# Altium PCB SiLabsProg2_V14C.PcbDoc
Units mm, origin at the board's own origin, x right, y up, seen from the top; angles counter-clockwise.
Board outline 40 x 76.83 mm, 2 copper layers (Top Layer, Bottom Layer); 101 components, 102 nets, 415 pads, 123 vias.
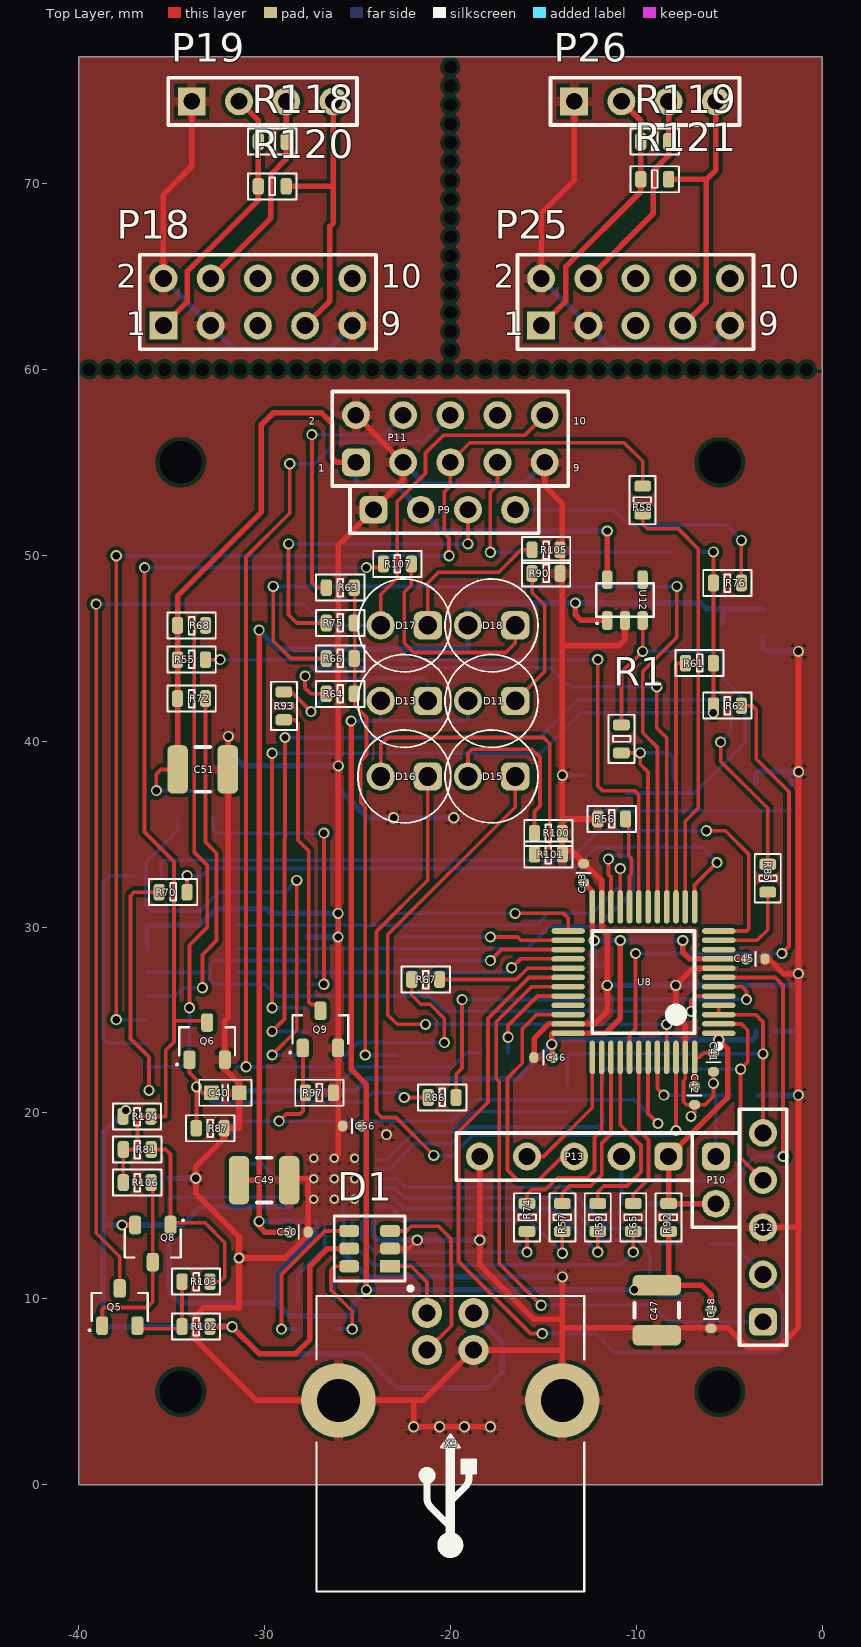
[diagram p0: Top Layer view]
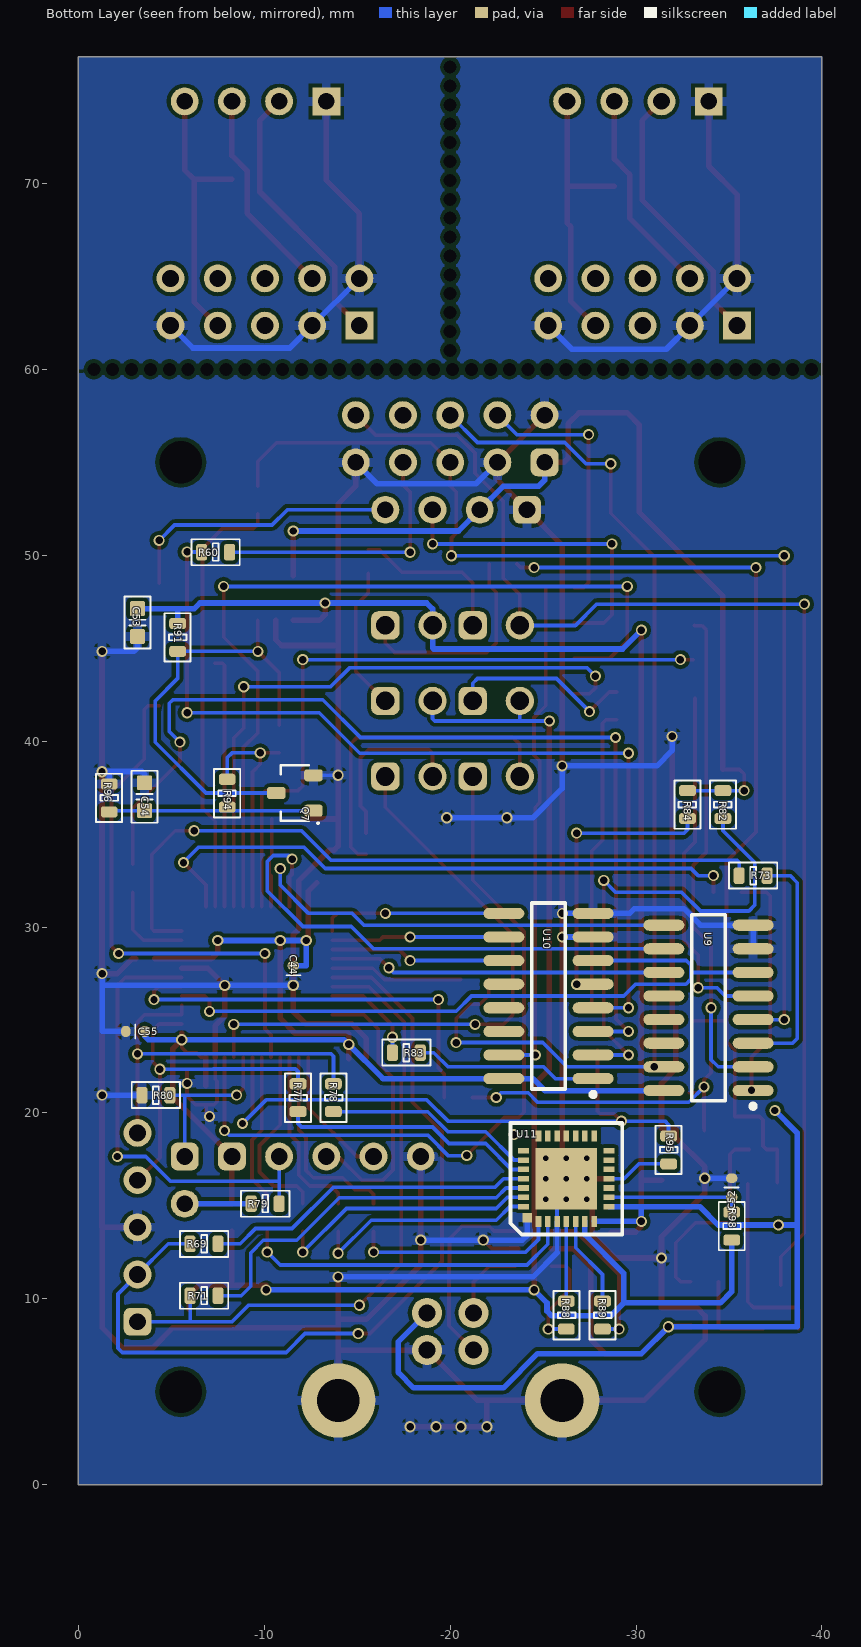
[diagram p1: Bottom Layer view, seen from below]
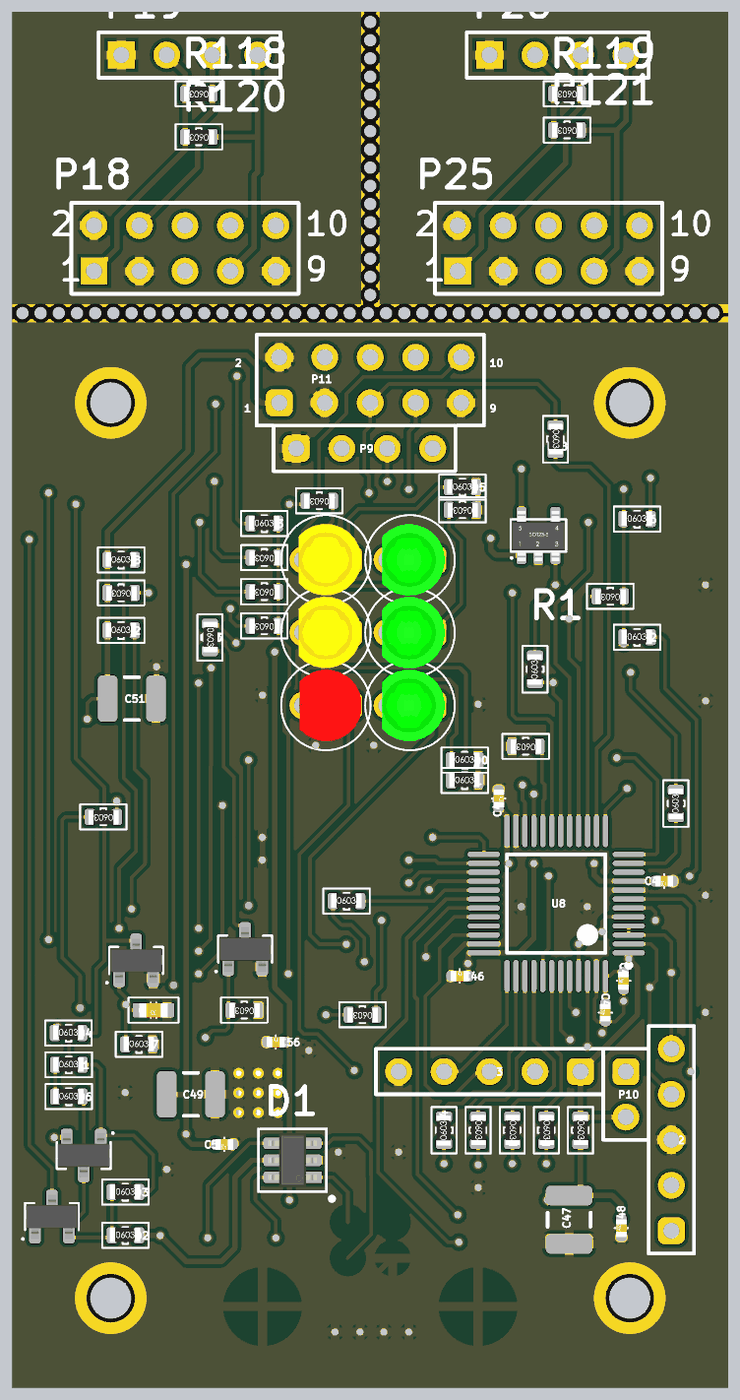
[diagram p2: 3D render of the assembled board from above, using the file's embedded part models]
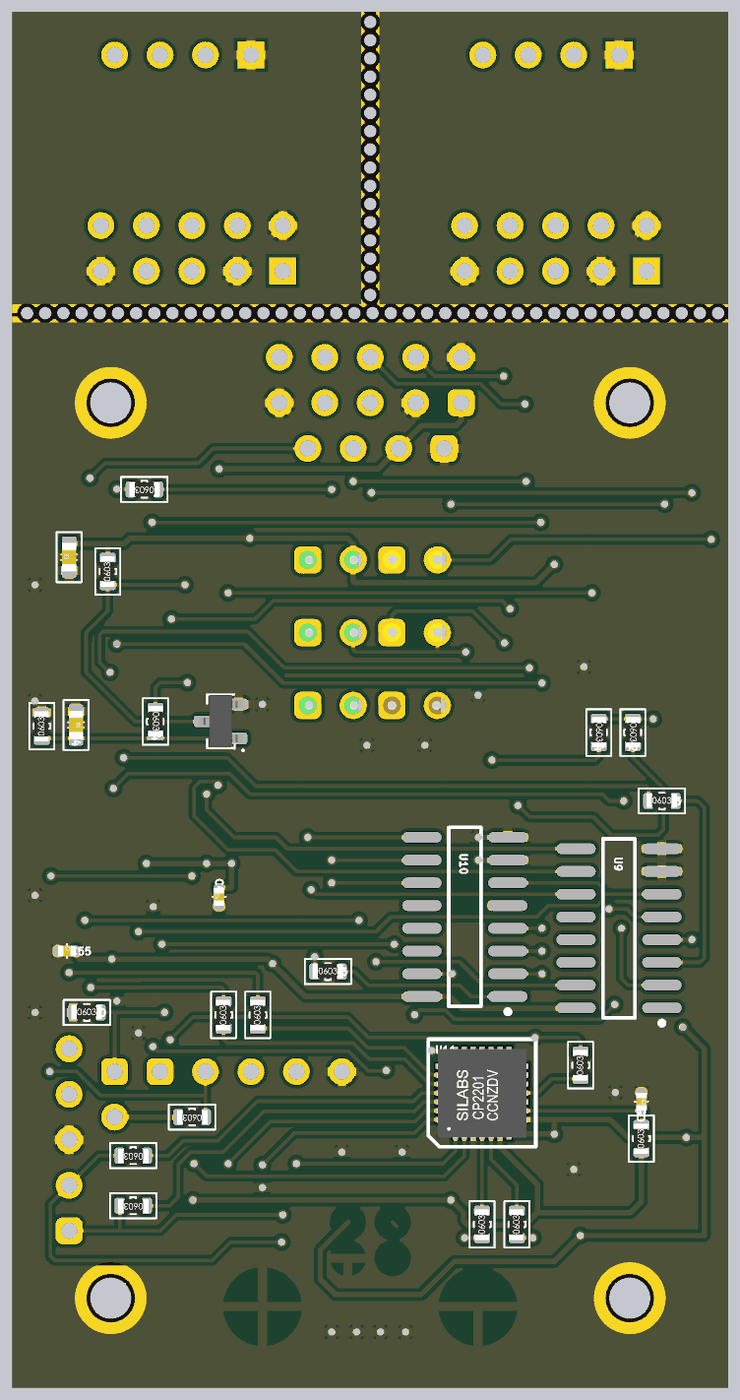
[diagram p3: 3D render of the assembled board from below, using the file's embedded part models]

## Layer stack, top to bottom
Top Layer: signal copper 0.0356
Dielectric: dielectric 0.32, FR-4, Dk 4.8
Bottom Layer: signal copper 0.0356

## Board outline
-40,76.835 0,76.835 0,0 -40,0

## Design rules (kind name [scope] priority, off if disabled: settings)
Clearance [All] p1: gap=0.2
ComponentClearance [All] p1 off: gap=0.254 collisioncheckmode=3 verticalgap=0.25 showdistances=FALSE
FabricationTestPointUsage TestPointUsage [All] p1: valid=0 allowmultiple=FALSE
FabricationTestpoint Testpoint [All] p1: side=3 testpointundercomponent=TRUE minsize=1.016 maxsize=2.54 preferedsize=1.524 minholesize=0 maxholesize=1.016 preferedholesize=0.813 testpointgrid=0.025 allowsidetop=TRUE allowsidebottom=TRUE usegrid=TRUE gridtolerance=0
Height [All] p1 off: minheight=0 maxheight=25.4 prefheight=12.7
HoleSize [All] p1: absolutevalues=TRUE maxlimit=3.5 minlimit=0.3 maxpercent=80.000 minpercent=20.000
PolygonConnect PolygonConnect_BigHole [(IsVia And (HoleDiameter >= 0.4)) or (IsPad And (HoleDiameter >= 0.4))] p1: connectstyle=Relief reliefconductorwidth=0.5 reliefentries=4 polygonreliefangle="90 Angle"
PolygonConnect PolygonConnect_SmallHole [All] p2: connectstyle=Relief reliefconductorwidth=0.5 reliefentries=4 polygonreliefangle="90 Angle"
RoutingCorners [All] p1: cornerstyle=45-Degree minsetback=1 maxsetback=1
RoutingVias [All] p1: holewidth=0.3 width=0.6 viastyle="Through Hole" minholewidth=0.2 minwidth=0.5 maxholewidth=0.4 maxwidth=0.7
SilkscreenOverComponentPads [All] p1: minsilkscreentomaskgap=0.254
SolderMaskExpansion [All] p1: expansion=0.05
Width [All] p1: maxlimit=0.4 minlimit=0.2 preferedwidth=0.3
21 further rules are at their usual default settings.

## Components (designator, comment, footprint, x,y, rotation, side; value= is the part's Value field where it differs from the comment)
C40 "1nF" R1608_CAP -31.355,21.082 r180 top
C41 "0.1uF" R1005_CAP -5.842,22.241 r90 top
C42 "0.1uF" R1005_CAP -6.858,20.463 r90 top
C43 "0.1uF" R1005_CAP -12.827,33.385 r270 top
C44 "0.1uF" R1005_CAP -11.557,26.924 r90 bottom
C45 "0.1uF" R1005_CAP -3.098,28.287 r180 top
C46 "0.1uF" R1005_CAP -15.478,22.987 r0 top
C47 "4.7uF" CAPC3225L -8.89,9.382 r270 top
C48 "0.1uF" R1005_CAP -5.969,8.431 r90 top
C49 "4.7uF" CAPC3225L -30.019,16.383 r0 top
C50 "0.1uF" R1005_CAP -27.672,13.589 r180 top
C51 "4.7uF" CAPC3225L -33.321,38.481 r0 top
C52 "0.1uF" R1005_CAP -35.145,16.461 r270 bottom
C53 "1uF" R1608_CAP -3.175,45.631 r90 bottom
C54 "1nF" R1608_CAP -3.556,37.761 r270 bottom
C55 "0.1uF" R1005_CAP -2.57,24.384 r180 bottom
C56 "0.1uF" R1005_CAP -25.765,19.304 r0 top
D1 "USBLC6-2P6" SOT23-6 -23.241,11.75 r180 top
D11 "LED_G" LED3G -16.51,42.164 r180 top locked
D13 "LED_Y" LED3Y -21.209,42.164 r180 top locked
D15 "LED_G" LED3G -16.51,38.1 r180 top locked
D16 "LED_R" LED3R -21.209,38.1 r180 top locked
D17 "LED_Y" LED3Y -21.209,46.228 r180 top locked
D18 "LED_G" LED3G -16.51,46.228 r180 top locked
P9 "SiLabs C2" HDR1X4#1 -24.13,52.451 r0 top locked
P10 "STM_PROG" HDR1X2 -5.715,17.653 r270 top locked
P11 "SiLabs JTAG" HDR2X5#1 -25.08,55 r0 top
P12 "UART" HDR1X5 -3.175,8.763 r90 top locked
P13 "STM SWD" HDR1X5 -8.255,17.653 r180 top locked
P18 "SiLabs JTAG" HDR2X5#2 -35.433,62.357 r0 top locked
P19 "SiLabs C2" HDR1X4#2 -33.909,74.422 r0 top locked
P25 "SiLabs JTAG" HDR2X5#2 -15.113,62.357 r0 top locked
P26 "SiLabs C2" HDR1X4#2 -13.335,74.422 r0 top locked
Q5 "IRLML6402" SOT23-1 -37.785,9.557 r0 top
Q6 "BC847" SOT23-1 -33.081,23.86 r0 top
Q7 "BC847" SOT23-1 -11.641,37.211 r90 bottom
Q8 "BC807-25" SOT23-1 -36.007,12.97 r180 top
Q9 "BC847" SOT23-1 -26.99,24.495 r0 top
R1 "100*" R1608_RES -10.795,39.37 r90 top
R55 "100" R1608_RES -33.171,44.386 r180 top
R56 "5.1k" R1608_RES -10.565,35.814 r180 top
R57 "100" R1608_RES -13.97,15.127 r270 top
R58 "100" R1608_RES -9.652,53.721 r270 top
R59 "100" R1608_RES -12.065,15.127 r270 top
R60 "100" R1608_RES -8.128,50.165 r0 bottom
R61 "100" R1608_RES -5.842,44.196 r180 top
R62 "0" R1608_RES -5.842,41.91 r0 top
R63 "100" R1608_RES -26.67,48.26 r0 top
R64 "100" R1608_RES -25.17,42.545 r180 top
R65 "100" R1608_RES -10.16,15.127 r270 top
R66 "100" R1608_RES -25.17,44.45 r180 top
R67 "100" R1608_RES -22.074,27.178 r0 top
R68 "5.1k" R1608_RES -34.671,46.228 r0 top
R69 "100" R1608_RES -7.507,12.954 r0 bottom
R70 "5.1k" R1608_RES -34.163,31.877 r180 top
R71 "100" R1608_RES -7.507,10.16 r0 bottom
R72 "5.1k" R1608_RES -34.671,42.291 r0 top
R73 "5.1k" R1608_RES -35.546,32.766 r180 bottom
R74 "100" R1608_RES -15.875,13.627 r90 top
R75 "100" R1608_RES -25.17,46.355 r180 top
R76 "100" R1608_RES -5.842,48.514 r0 top
R77 "100" R1608_RES -11.811,20.066 r90 bottom
R78 "100" R1608_RES -13.716,20.066 r90 bottom
R79 "47k" R1608_RES -10.795,15.113 r0 bottom
R80 "47k" R1608_RES -3.415,20.955 r180 bottom
R81 "18k" R1608_RES -37.592,18.034 r0 top
R82 "5.1k" R1608_RES -34.671,37.338 r270 bottom
R83 "5.1k" R1608_RES -16.891,23.241 r180 bottom
R84 "5.1k" R1608_RES -32.766,37.338 r270 bottom
R85 "5.1k" R1608_RES -2.921,31.877 r90 top
R86 "5.1k" R1608_RES -19.685,20.828 r180 top
R87 "47k" R1608_RES -33.669,19.177 r0 top
R88 "27" R1608_RES -26.25,8.368 r90 bottom
R89 "27" R1608_RES -28.194,8.368 r90 bottom
R90 "330" R1608_RES -14.097,49.022 r180 top
R91 "47k" R1608_RES -5.334,44.831 r90 bottom
R92 "0" R1608_RES -8.255,15.127 r270 top
R93 "330" R1608_RES -28.956,42.648 r270 top
R94 "5.1k" R1608_RES -8.001,37.949 r270 bottom
R95 "5.1k" R1608_RES -31.75,17.258 r90 bottom
R96 "47k" R1608_RES -1.651,36.195 r90 bottom
R97 "47k" R1608_RES -26.289,21.082 r180 top
R98 "4.7k" R1608_RES -35.145,13.16 r90 bottom
R100 "330" R1608_RES -15.47,35.052 r0 top
R101 "330" R1608_RES -15.47,33.909 r0 top
R102 "3.0" R1608_RES -34.431,8.509 r0 top
R103 "150" R1608_RES -34.431,10.922 r0 top
R104 "2.2k" R1608_RES -37.606,19.812 r0 top
R105 "330" R1608_RES -15.597,50.292 r0 top
R106 "2.2k" R1608_RES -37.592,16.256 r0 top
R107 "330" R1608_RES -22.098,49.53 r180 top
R118 "R" R1608_RES -28.829,72.263 r180 top
R119 "R" R1608_RES -8.255,72.263 r180 top
R120 "R" R1608_RES -28.829,69.85 r180 top
R121 "R" R1608_RES -8.255,70.231 r180 top
U8 "STM32F100C8T6B" LQFP48_N -9.608,27.037 r180 top locked
U9 "M74HC4053M1R" SO16_N -33.896,25.654 r0 bottom locked
U10 "M74HC4053M1R" SO16_N -25.286,26.289 r0 bottom locked
U11 "CP2102-GM" QFN28 -26.25,16.461 r90 bottom locked
U12 "TPS76333 / NCP551" SOT23-5D -10.602,47.59 r0 top
X3 "USB-B" USB_TypeB_Tyco -20,-5.751 r90 top locked

## Footprints (in the part's own frame and the unit in brackets; to place one, negate y for a bottom-side part, rotate by r counter-clockwise, add the part's x,y. Pads: shape width x height; smd on the part's side, far side on the other; paste and mask are expansions set on the pad)
CAPC3225L [mm] "Chip Capacitor, Body 3.2x2.5mm, IPC High Density"
  rrect50% 1.1x2.6 smd: 1(-1.35,0) 2(1.35,0)
  silkscreen extent -0.4,-1.2 0.4,1.2, body extent -1.7,-1.35 1.7,1.35, height 1.5
HDR1X2 [mm] "Connector; Header; 2 Position"
  rrect50% 1.5x1.5 hole 0.9: 1(0,0)
  round 1.5 hole 0.9: 2(2.54,0)
  silkscreen extent -1.27,-1.27 3.81,1.27
HDR1X4#1 [mm] "Connector; Header; 4 Position"
  rrect50% 1.5x1.5 hole 0.9: 1(0,0)
  round 1.5 hole 0.9: 2(2.54,0) 3(5.08,0) 4(7.62,0)
  silkscreen extent -1.27,-1.27 8.89,1.27
HDR1X4#2 [mm] "Connector; Header; 4 Position"
  rect 1.5x1.5 hole 0.9: 1(0,0)
  round 1.5 hole 0.9: 2(2.54,0) 3(5.08,0) 4(7.62,0)
  silkscreen extent -1.27,-1.27 8.89,1.27
HDR1X5 [mm] "Connector; Header; 5 Position"
  rrect50% 1.5x1.5 hole 0.9: 1(0,0)
  round 1.5 hole 0.9: 2(2.54,0) 3(5.08,0) 4(7.62,0) 5(10.16,0)
  silkscreen extent -1.27,-1.27 11.43,1.27
HDR2X5#1 [mm] "Connector; Header; 5x2 Position"
  rrect50% 1.5x1.5 hole 0.9: 1(0,0)
  round 1.5 hole 0.9: 2(0,2.54) 3(2.54,0) 4(2.54,2.54) 5(5.08,0) 6(5.08,2.54) 7(7.62,0) 8(7.62,2.54) 9(10.16,0) 10(10.16,2.54)
  silkscreen extent -1.27,-1.27 11.43,3.81
HDR2X5#2 [mm] "Connector; Header; 5x2 Position"
  rect 1.5x1.5 hole 0.9: 1(0,0)
  round 1.5 hole 0.9: 2(0,2.54) 3(2.54,0) 4(2.54,2.54) 5(5.08,0) 6(5.08,2.54) 7(7.62,0) 8(7.62,2.54) 9(10.16,0) 10(10.16,2.54)
  silkscreen extent -1.27,-1.27 11.43,3.81
LED3G [mil]
  rrect50% 60x60 hole 39.37: 1(0,0)
  round 60 hole 39.37: 2(100,0)
  silkscreen extent -48,-98 148,98, body extent -26,-78 111,78, height 244
LED3R [mil]
  rrect50% 60x60 hole 39.37: 1(0,0)
  round 60 hole 39.37: 2(100,0)
  silkscreen extent -48,-98 148,98, body extent -29,-78 108,78, height 244
LED3Y [mil]
  rrect50% 60x60 hole 39.37: 1(0,0)
  round 60 hole 39.37: 2(100,0)
  silkscreen extent -48,-98 148,98, body extent -28,-79 110,78, height 244
LQFP48_N [mm] "Thin QFP, 48-Leads, Body 7x7mm, Pitch 0.5mm, IPC Medium Density"
  oval 1.8x0.3 smd: 1(-4.05,2.75) 2(-4.05,2.25) 3(-4.05,1.75) 4(-4.05,1.25) 5(-4.05,0.75) 6(-4.05,0.25) 7(-4.05,-0.25) 8(-4.05,-0.75) 9(-4.05,-1.25) 10(-4.05,-1.75) 11(-4.05,-2.25) 12(-4.05,-2.75) 25(4.05,-2.75) 26(4.05,-2.25) 27(4.05,-1.75) 28(4.05,-1.25) 29(4.05,-0.75) 30(4.05,-0.25) 31(4.05,0.25) 32(4.05,0.75) 33(4.05,1.25) 34(4.05,1.75) 35(4.05,2.25) 36(4.05,2.75)
  oval 0.3x1.8 smd: 13(-2.75,-4.05) 14(-2.25,-4.05) 15(-1.75,-4.05) 16(-1.25,-4.05) 17(-0.75,-4.05) 18(-0.25,-4.05) 19(0.25,-4.05) 20(0.75,-4.05) 21(1.25,-4.05) 22(1.75,-4.05) 23(2.25,-4.05) 24(2.75,-4.05) 37(2.75,4.05) 38(2.25,4.05) 39(1.75,4.05) 40(1.25,4.05) 41(0.75,4.05) 42(0.25,4.05) 43(-0.25,4.05) 44(-0.75,4.05) 45(-1.25,4.05) 46(-1.75,4.05) 47(-2.25,4.05) 48(-2.75,4.05)
  silkscreen extent -4.18,-2.75 2.75,3.57, body extent -3.5,-3.5 3.5,3.5, height 1.6
QFN28 [mm] "QFN, 28-Leads, Body 5x5mm, Pitch 0.5mm, Thermal Pad 3.13x3.13mm, IPC Medium Density"
  rrect10% 0.6x0.3 smd mask+0.1: 1(-2.3,1.5) 2(-2.3,1) 3(-2.3,0.5) 4(-2.3,0) 5(-2.3,-0.5) 6(-2.3,-1) 7(-2.3,-1.5) 15(2.3,-1.5) 16(2.3,-1) 17(2.3,-0.5) 18(2.3,0) 19(2.3,0.5) 20(2.3,1) 21(2.3,1.5)
  rrect10% 0.3x0.6 smd mask+0.1: 8(-1.5,-2.3) 9(-1,-2.3) 10(-0.5,-2.3) 11(0,-2.3) 12(0.5,-2.3) 13(1,-2.3) 14(1.5,-2.3) 22(1.5,2.3) 23(1,2.3) 24(0.5,2.3) 25(0,2.3) 26(-0.5,2.3) 27(-1,2.3) 28(-1.5,2.3)
  rect 0.5x0.5 smd mask+0.1: 29(-2.1,2.1)
  rect 3.3x3.3 smd paste-1.65 mask+0: 29(0,0)
  silkscreen extent -3,-3 3,3, body extent -2.51,-2.5 2.49,2.5, height 1.07
R1005_CAP [mm] "SMD CAP-0402"
  rrect90% 0.5x0.6 smd: 1(-0.025,0) 2(1,0)
  silkscreen extent 0.48,-0.38 0.48,0.38, body extent -0.02,-0.3 0.98,0.3, height 0.2
R1608_CAP [mm] "SMD CAP-0603"
  rrect20% 0.8x0.8 smd: 1(0,0) 2(1.5,0)
  silkscreen extent -0.65,-0.7 2.15,0.7, body extent -0.05,-0.4 1.55,0.4, height 0.3
R1608_RES [mm] "SMD RES-0603"
  rrect50% 0.6x0.9 smd: 1(0,0) 2(1.5,0)
  silkscreen extent -0.55,-0.7 2.05,0.7, body extent -0.11,-0.38 1.59,0.42, height 0.56
SO16_N [mm] "SOIC, 16-Leads, Body 9.9x3.9mm, Pitch 1.27mm, IPC Medium Density"
  oval 2.2x0.6 smd: 1(-2.4,4.445) 2(-2.4,3.175) 3(-2.4,1.905) 4(-2.4,0.635) 5(-2.4,-0.635) 6(-2.4,-1.905) 7(-2.4,-3.175) 8(-2.4,-4.445) 9(2.4,-4.445) 10(2.4,-3.175) 11(2.4,-1.905) 12(2.4,-0.635) 13(2.4,0.635) 14(2.4,1.905) 15(2.4,3.175) 16(2.4,4.445)
  silkscreen extent -2.52,-5 0.9,5.42, body extent -1.95,-4.95 1.95,4.95, height 1.75
SOT23-1 [mm] "SOT23, 3-Leads, Body 2.9x1.3mm, Pitch 0.95mm, Lead Span 2.5mm"
  rrect50% 0.65x1 smd: 1(-0.95,-1) 2(0.95,-1) 3(0,1)
  silkscreen extent -1.68,-1.3 1.5,0.75, body extent -1.46,-1.25 1.46,1.22, height 1
SOT23-5D [mm] "SOT23, 5-Leads, Body 2.9x1.3mm, Pitch 0.95mm, Lead Span 2.5mm"
  rrect50% 0.55x1 smd: 1(-0.95,-1.1) 2(0,-1.1) 3(0.95,-1.1) 4(0.95,1.1) 5(-0.95,1.1)
  silkscreen extent -1.55,-1.3 1.55,0.9, body extent -1.45,-1.42 1.45,1.38, height 1.09
SOT23-6 [mm]
  rect 1.06x0.65 smd: 1(0,0)
  rrect50% 1.06x0.65 smd: 2(0,-0.95) 3(0,-1.9) 4(2.2,-1.9) 5(2.2,-0.95) 6(2.2,0)
  silkscreen extent -1.2,-2.7 3,1.3, body extent -0.25,-2.45 2.45,0.55, height 1
USB_TypeB_Tyco [mm]
  round 1.626 hole 0.914: 1(14.99,-1.25) 2(14.99,1.25) 3(12.99,1.25) 4(12.99,-1.25)
  round 4 hole 2.3: MH(10.28,-6.02) MH(10.28,6.02)
  silkscreen extent 0,-7.2 15.9,7.2, body extent 0,-7.19 15.7,7.19, height 11.5

## Part data
C40 C41 C42 C43 C44 C45 C46 C48 C50 C52 C53 C54 C55 C56: library part C, "Capacitor"
C47 C49 C51: library part "Cap Pol1", "Polarized Capacitor (Radial)"
P9 P19 P26: library part "Header 4", "Header, 4-Pin"
P10: library part "Header 2", "Header, 2-Pin"
P11 P18 P25: library part "Header 5X2", "Header, 5-Pin, Dual row"
P12 P13: library part "Header 5", "Header, 5-Pin"
Q5: library part IRLML6401, "HEXFET Power MOSFET"
Q6 Q7 Q9: "NPN General-purpose Transistor"
Q8: "PNP General-purpose Transistor"
R1 R55 R56 R57 R58 R59 R60 R61 R62 R63 R64 R65 R66 R67 R68 R69 R70 R71 R72 R73 R74 R75 R76 R77 R78 R79 R80 R81 R82 R83 R84 R85 R86 R87 R88 R89 R90 R91 R92 R93 R94 R95 R96 R97 R98 R100 R101 R102 R103 R104 R105 R106 R107: library part R, "Resistor"
R118 R119 R120 R121: "Resistor"
U8: "STM32 ARM-based 32-bit MCU Value Line with 64 kB Flash, 8 kB Internal RAM, Internal Code B, -40 to +85°C Temperature, 48-Pin LQFP, Tray"
U9 U10: "Analog Multiplexer/Demultiplexer Triple 2-Channel"
U11: "Single Chip USB to UART Bridge, USB 2.0, 1024Bytes EEPROM."
U12: library part TPS76333, "300 mA, Low Voltage, Low Quiescent Current LDO Regulator, 5-Pin SOT-23, Extended Temperature, Tape and Reel"
X3: library part USB_TypeB, "Connector THT Type B USB connector"

## Free pads (board coordinates)
  round 0 hole 0.7 unplated mask+0.4: HOLE(-39.433,60.008) HOLE(-38.417,60.008) HOLE(-37.401,60.008) HOLE(-36.385,60.008) HOLE(-35.369,60.008) HOLE(-34.353,60.008) HOLE(-33.337,60.008) HOLE(-32.321,60.008) HOLE(-31.305,60.008) HOLE(-30.289,60.008) HOLE(-29.273,60.008) HOLE(-28.257,60.008) HOLE(-27.241,60.008) HOLE(-26.225,60.008) HOLE(-25.209,60.008) HOLE(-24.193,60.008) HOLE(-23.177,60.008) HOLE(-22.161,60.008) HOLE(-21.145,60.008) HOLE(-20.129,60.008) HOLE(-20,61.023) HOLE(-20,62.04) HOLE(-20,63.056) HOLE(-20,64.072) HOLE(-20,65.088) HOLE(-20,66.104) HOLE(-20,67.12) HOLE(-20,68.136) HOLE(-20,69.152) HOLE(-20,70.168) HOLE(-20,71.184) HOLE(-20,72.2) HOLE(-20,73.216) HOLE(-20,74.232) HOLE(-20,75.248) HOLE(-20,76.264) HOLE(-19.113,60.008) HOLE(-18.097,60.008) HOLE(-17.081,60.008) HOLE(-16.065,60.008) HOLE(-15.049,60.008) HOLE(-14.033,60.008) HOLE(-13.017,60.008) HOLE(-12.001,60.008) HOLE(-10.985,60.008) HOLE(-9.969,60.008) HOLE(-8.953,60.008) HOLE(-7.937,60.008) HOLE(-6.921,60.008) HOLE(-5.905,60.008) HOLE(-4.889,60.008) HOLE(-3.873,60.008) HOLE(-2.857,60.008) HOLE(-1.841,60.008) HOLE(-0.825,60.008)
  round 0 hole 2.3 unplated mask+2: HOLE(-34.5,5) HOLE(-34.5,55) HOLE(-5.5,5) HOLE(-5.5,55)

## Via types
v1: diameter 0.6, hole 0.4, Top Layer to Bottom Layer, tented both sides, 114 vias
v2: diameter 0.5, hole 0.3, Top Layer to Bottom Layer, 9 vias

## Nets (pads, with @x,y where several pads share a name; then routed paths per layer and width w, separated by ;. In a path a pad name is that pad's centre, name@x,y a point inside that pad or via, vN(x,y) a via of type N, cw(c..) or ccw(c..) an arc to the next point about the centre after c; other vN are vias at no path point)
BOOT0: P10.1 R80.2 U8.44 | length 9.1
  Top Layer w0.2: U8.44 -8.858,21.304 v1(-8.509,20.955)
  Bottom Layer w0.2: v1(-8.509,20.955) -5.715,20.955 ; P10.1 -5.715,20.955 ; R80.2 -5.715,20.955
BOOT1: R56.1 U8.20 | length 4.8
  Top Layer w0.2: R56.1@-10.4,35.814 -10.4,33.831 -10.258,33.69 -10.258,32.858 -10.358,32.758 U8.20
DBL_CLK: R62.2 U8.41 | length 28.4
  Top Layer w0.2: U8.41 -10.358,24.186 -10.033,24.511 v1@-10.033,28.511 ; R62.2 -3.746,41.91 -3.542,41.705 -3.542,39.038 -1.778,37.274 -1.778,28.956 v1(-2.159,28.575)
  Bottom Layer w0.2: v1(-10.033,28.575) v1(-2.159,28.575)
GNN: C40.1 C41.1 C42.1 C43.1 C44.1 C45.1 C46.1 C47.2 C48.1 C49.2 C50.1 C51.2 C52.1 C53.1 C54.1 C55.1 C56.1 D1.2 P9.1 P11.2 P11.3 P11.9 P12.3 P13.5 Q6.2 Q7.2 Q9.2 R56.2 R80.1 R87.2 R90.1 R96.2 R97.1 R100.2 R101.2 R105.2 U8.8 U8.23 U8.35 U8.47 U9.7 U9.8 U10.7 U10.8 U11.3 U11.29 U12.2 X3.4 X3.MH | length 331
  Top Layer w0.2: D1.2 -22.234,12.7 v1(-21.78,13.154) ; U8.47 -7.358,21.805 -7.458,21.705 -7.458,20.602 -7.294,20.438 C42.1 ; v1(-7.048,19.812) -6.858,20.002 C42.1 ; C41.1 v1(-5.842,21.59) -5.842,20.891 -6.295,20.438 C42.1
  Top Layer w0.3: C51.2@-31.94,38.45 -31.94,25.146 -32.131,24.955 Q6.2 -32.131,22.352 -31.369,21.59 -31.369,19.177 R87.2 -32.169,18.631 -33.694,17.106 v1(-33.694,16.485) -33.694,15.66 -31.369,13.335 v1(-31.369,12.192) ; C51.2@-31.94,38.511 v1(-31.94,40.259) ; C49.2@-28.591,16.461 -27.647,16.461 ; C50.1@-27.647,13.525 -27.672,13.525 -27.672,13.413 -28.892,12.192 v1(-31.369,12.192) ; C50.1 -27.647,16.461 ; v2(-27.35,16.461) -27.647,16.461 ; v2(-26.25,17.561) -26.02,17.79 v1(-26.02,38.671) -26.02,50.561 P9.1 -22.54,54.041 P11.3 P11.2 ; D1.2@-23.63,12.7 D1.2 ; -21.971,4.466 v1(-21.971,3.111) v1(-20.574,3.111) v1(-19.241,3.111) v1(-17.843,3.111) ; P13.5 v1(-18.415,13.154) -18.415,11.811 -15.494,8.89 -13.98,8.89 ; C46.1@-15.494,22.987 -15.494,24.003 -14.71,24.787 U8.35 -12.234,24.787 -11.557,25.463 v1(-11.557,26.86) -11.557,29.591 -11.858,29.892 U8.23 -11.858,32.496 -13.494,34.131 -13.748,34.131 -13.97,34.353 R100.2 -13.97,35.814 ; P11.9 -14.92,53.719 -13.97,52.768 -13.97,45.148 ; X3.MH@-13.98,4.529 -13.98,7.239 ; v1(-13.97,11.176) -13.98,11.166 -13.98,8.89 ; R56.2 -13.97,35.814 ; U12.2@-10.607,46.495 -10.607,45.464 -10.922,45.148 -13.97,45.148 ; U8.47 -7.358,24.693 -7.874,25.209 v1(-7.874,26.86) -6.947,27.787 U8.8 ; P12.3 -1.27,13.843 ; C45.1 -2.886,28.287 -2.094,27.495 v1(-1.27,27.495) v1@-1.265,27.495 ; v1@-1.265,44.831 v1(-1.265,38.354) v1@-1.265,27.495 ; v1(-31.369,12.192) -31.369,9.525 -33.274,9.525 -33.718,9.08 -33.718,7.81 -30.437,4.529 -26.02,4.529 -21.46,4.529 X3.4 -13.98,7.239 ; -13.98,7.239 -13.98,8.445 ; -13.98,8.445 -13.98,8.89 ; -13.98,8.445 -5.08,8.445 -4,7.366 -2.349,7.366 -1.27,8.445 -1.27,13.843 ; -13.97,35.814 v1(-13.97,38.163) -13.97,45.148 ; -1.27,13.843 -1.265,13.848 v1@-1.265,27.495
  Bottom Layer w0.2: -25.75,12.478 U11.29@-25.75,14.986 ; v1@-13.967,38.161 Q7.2
  Bottom Layer w0.3: U9.7 U9.8 -33.464,30.099 -32.575,30.988 -29.908,30.988 -29.654,30.734 U10.8 v1(-26.035,30.734) ; C52.1 v1(-33.694,16.485) ; v1(-31.94,40.259) -31.94,39.497 -31.115,38.671 v1(-26.02,38.671) -26.02,37.45 -24.447,35.877 v1(-23.05,35.877) v1(-19.812,35.877) ; U10.7 v1(-26.035,29.464) ; -25.75,12.478 -24.447,11.176 v1(-13.97,11.176) ; U11.29@-24.15,14.36 -24.15,13.418 -23.885,13.154 v1(-21.78,13.154) v1(-18.415,13.154) ; P11.3 -21.388,53.848 -16.072,53.848 P11.9 ; v1(-11.557,26.86) v1(-7.874,26.86) -1.27,26.86 ; C54.1 -3.556,38.227 -3.415,38.368 v1@-1.27,38.368 ; R80.1 v1(-1.27,20.955) ; C53.1 -3.175,45.021 -2.984,44.831 v1(-1.27,44.831) ; C55.1 -1.27,24.384 -1.27,26.86 ; R96.2 -1.651,38.368 ; v1(-1.27,27.495) -1.27,26.86
  other v1: -23.431,18.83
  other v2: -27.35,15.361 -26.25,15.361 -25.15,15.361 -26.25,16.461 -25.15,16.461 -27.35,17.561 -25.15,17.561
MCTS: P12.4 R77.2 U8.2 | length 18.6
  Top Layer w0.2: U8.2 -4.34,24.787 -4,24.447 -4,22.733 v1(-4.381,22.352) -4.381,17.589 P12.4
  Bottom Layer w0.2: R77.2 -11.811,22.225 -11.67,22.366 -7.253,22.366 -7.239,22.352 v1(-4.381,22.352)
MDCD: R74.2 U8.38 | length 10.9
  Top Layer w0.2: R74.2 -15.875,15.621 -15.621,15.875 -14.859,15.875 -14.224,16.51 -12.636,16.51 -12.245,16.902 -12.245,18.68 -11.858,19.066 U8.38
MDSR: R59.1 U8.40 | length 10
  Top Layer w0.2: R59.1 -12.065,15.748 -11.747,16.065 -10.496,16.065 -9.734,16.827 -9.734,18.243 -10.858,19.367 U8.40
MDTR: R57.1 U8.39 | length 9.6
  Top Layer w0.2: R57.1 -13.97,15.684 -13.589,16.065 -12.446,16.065 -11.845,16.666 -11.845,18.381 -11.358,18.868 U8.39
MRI: R65.1 U8.42 | length 8.4
  Top Layer w0.2: R65.1 -10.16,15.621 -9.335,16.446 -9.335,18.542 -9.858,19.065 U8.42
MRTS: P12.5 R78.2 U8.3 U8.4 | length 21.1
  Top Layer w0.2: U8.4 U8.3 -3.57,25.287 -3.175,24.892 v1(-3.175,23.177) P12.5
  Bottom Layer w0.2: R78.2 -13.716,23.05 -13.589,23.177 v1(-3.175,23.177)
MRX: P12.1 R71.2 U8.31 | length 35.2
  Top Layer w0.2: v1(-15.113,9.652) -17.365,11.904 -17.365,21.683 -17.526,21.844 -17.526,24.892 -15.631,26.787 U8.31 ; P12.1@-3.644,9.232 P12.1
  Bottom Layer w0.2: v1(-15.113,9.652) -9.144,9.652 -8.255,8.763 P12.1 ; -6.007,8.789 R71.2
MTX: P12.2 R69.2 U8.30 | length 46.4
  Top Layer w0.2: v1(-15.05,8.128) -15.684,8.128 -19.558,12.001 -19.558,18.986 -17.97,20.574 -17.97,25.082 -15.766,27.287 U8.30
  Bottom Layer w0.2: v1(-15.05,8.128) -12.192,8.128 -11.176,7.112 -2.349,7.112 -2.125,7.337 -2.125,10.253 P12.2 -4.826,12.954 R69.2
NetC40_2: C40.2 Q6.1 R86.2 R87.1 | length 18
  Top Layer w0.2: Q6.1 -34.031,22.156 -33.655,21.78 v1(-33.655,21.399) ; R87.1@-33.669,19.05 R87.1 ; R87.1@-33.655,19.191 v1(-33.655,21.399) ; C40.2 -33.337,21.082 v1(-33.655,21.399) ; v1(-22.479,20.828) R86.2
  Bottom Layer w0.2: v1(-33.655,21.399) -32.829,20.574 -24.701,20.574 -24.194,21.082 -22.733,21.082 v1(-22.479,20.828)
NetC54_2: C54.2 Q7.1 R94.2 R96.1 | length 11
  Bottom Layer w0.2: Q7.1 C54.2 R96.1@-1.651,36.261
NetD1_4: D1.4 R89.1 | length 8.4
  Top Layer w0.2: v1(-29.083,8.368) -29.083,11.311 -26.744,13.65 D1.4
  Bottom Layer w0.2: v1(-29.083,8.368) R89.1
NetD1_6: D1.6 R88.1 | length 5.7
  Top Layer w0.2: D1.6 -26.223,11.75 -26.416,11.557 -26.416,10.477 -25.273,9.334 v1(-25.273,8.368)
  Bottom Layer w0.2: R88.1 v1(-25.273,8.368)
NetD11_1: D11.1 R90.2 | length 7.8
  Top Layer w0.2: D11.1 -14.922,43.751 -14.922,47.307 -15.597,47.982 R90.2
NetD13_1: D13.1 R93.1 | length 10
  Top Layer w0.2: R93.1 -28.551,42.648 v1(-27.495,41.592)
  Bottom Layer w0.2: v1(-27.495,41.592) -25.717,43.37 -21.463,43.37 -21.209,43.116 D13.1
NetD15_2: D15.2 R100.1 | length 9.6
  Top Layer w0.2: D15.2 -19.05,39.351 -18.841,39.56 -15.621,39.56 -15.176,39.116 -15.176,36.512 -15.47,36.219 R100.1
NetD16_2: D16.2 R101.1 | length 17.6
  Top Layer w0.2: D16.2 -23.749,39.814 -23.368,40.195 -14.986,40.195 -14.65,39.859 -14.65,34.309 -15.05,33.909 R101.1
NetD17_1: D17.1 R105.1 | length 8.6
  Top Layer w0.2: D17.1 -21.209,48.514 -20.637,49.085 -17.399,49.085 -16.192,50.292 R105.1
NetD18_1: D18.1 R107.1 | length 11.8
  Top Layer w0.2: R107.1 -22.098,48.387 -22.479,48.006 -22.479,45.275 -21.971,44.767 -17.018,44.767 -16.51,45.275 D18.1
NetP9_3: P9.3 R75.2 | length 17.5
  Top Layer w0.2: v1(-28.702,50.609) -28.702,46.799 -28.257,46.355 R75.2 ; v1(-19.05,50.609) P9.3
  Bottom Layer w0.2: v1(-28.702,50.609) v1(-19.05,50.609)
NetP9_4: P9.4 R76.2 | length 15.1
  Top Layer w0.2: R76.2 v1(-4.342,50.8)
  Bottom Layer w0.2: P9.4 -11.239,52.451 -10.414,51.625 -5.167,51.625 v1(-4.342,50.8)
NetQ5_1: Q5.1 Q8.3 R106.2 | length 10.3
  Top Layer w0.2: Q5.1@-38.735,8.382 -38.735,9.398 -38.608,9.525 -36.322,9.525 -36.007,9.84 Q8.3 R106.2@-36.007,16.171
NetQ5_2: Q5.2 R102.1 R103.1 | length 4.9
  Top Layer w0.2: Q5.2@-36.835,8.382 -34.558,8.382 R102.1 R103.1
NetQ7_3: Q7.3 R1.2 R91.1 U12.3 | length 23.4
  Top Layer w0.2: R1.2 -10.795,43.688 v1(-9.652,44.831) U12.3
  Bottom Layer w0.2: Q7.3@-10.541,37.211 -6.858,37.211 -4.127,39.941 -4.127,42.168 -5.334,43.374 R91.1 -5.334,44.836 -9.583,44.836 -9.588,44.831 v1(-9.652,44.831)
NetQ8_1: Q8.1 R81.2 R103.2 | length 10.9
  Top Layer w0.2: R81.2 -35.306,18.034 -35.052,17.78 -35.052,14.097 -33.211,14.097 -32.131,13.017 -32.131,11.176 -32.385,10.922 R103.2
NetQ9_3: Q9.3 R93.2 | length 16.8
  Top Layer w0.2: R93.2 -28.384,41.148 -28.194,40.957 -28.194,34.671 -27.622,34.099 -27.622,25.971 -27.478,25.827 Q9.3@-26.97,25.827
NetR68_2: R68.2 U9.2 | length 27
  Top Layer w0.2: v1(-34.036,25.654) -34.036,29.019 -33.083,29.972 -33.083,33.337 -33.782,34.036 -33.782,45.974 -33.54,46.216 -33.159,46.216 R68.2@-33.147,46.228
  Bottom Layer w0.2: U9.2 -34.417,22.479 -34.036,22.86 v1(-34.036,25.654)
NetR70_2: R70.2 U9.1 | length 12.5
  Top Layer w0.2: v1(-36.209,21.209) -36.209,23.001 -37.211,24.003 -37.211,31.686 -37.02,31.877 R70.2
NetR72_2: R72.2 U9.5 | length 19.3
  Top Layer w0.2: v1(-33.337,26.733) -33.337,28.511 -32.575,29.273 -32.575,33.972 -33.171,34.568 R72.2
  Bottom Layer w0.2: U9.5 -34.798,26.289 -34.353,26.733 v1(-33.337,26.733)
NetR73_2: R73.2 U9.3 | length 12.6
  Bottom Layer w0.2: R73.2 -38.29,32.766 -38.671,32.385 -38.671,24.003 -38.418,23.749 U9.3
NetR82_2: R82.2 U10.2 | length 26.2
  Top Layer w0.2: v1(-29.591,23.114) -28.257,24.447 v1(-28.257,32.512)
  Bottom Layer w0.2: R82.2 -34.671,35.179 -36.385,33.464 -36.385,31.178 -36.068,30.861 -33.464,30.861 -32.448,31.877 -28.892,31.877 v1(-28.257,32.512) ; v1(-29.591,23.114) U10.2
NetR83_2: R83.2 U10.1 | length 9.8
  Bottom Layer w0.2: U10.1 -25.654,21.844 -25.019,22.479 -19.875,22.479 -19.113,23.241 R83.2@-18.415,23.241
NetR84_2: R84.2 U10.5 | length 15.7
  Top Layer w0.2: v1(-26.797,26.924) v1(-26.797,35.052)
  Bottom Layer w0.2: R84.2 -32.766,35.242 -32.561,35.038 -26.811,35.038 v1(-26.797,35.052) ; U10.5 v1(-26.797,26.924)
NetR85_2: R85.2 U10.3 | length 52.9
  Top Layer w0.2: v1(-29.591,24.384) -28.92,25.055 -28.92,34.707 -28.892,34.734 v1(-28.892,40.195) ; v1(-5.457,39.946) -5.457,38.921 -2.921,36.385 R85.2
  Bottom Layer w0.2: v1(-29.591,24.384) U10.3 ; v1(-28.892,40.195) -15.176,40.195 -13.144,42.227 -5.08,42.227 -4.889,42.037 -4.889,40.513 v1(-5.457,39.946)
NetR88_2: R88.2 U11.4 | length 4.3
  Bottom Layer w0.2: R88.2 U11.4
NetR89_2: R89.2 U11.5 | length 4.9
  Bottom Layer w0.2: R89.2 -28.194,11.303 -26.75,12.747 U11.5
NRST: P13.2 R79.1 U8.7 | length 24.6
  Top Layer w0.2: U8.7 -2.522,27.287 -2.095,26.86 v1(-2.095,17.653)
  Bottom Layer w0.2: R79.1 -10.795,16.319 ; P13.2 -10.795,16.319 ; v1(-2.095,17.653) -3.619,17.653 -4.953,16.319 -10.795,16.319
OE_VPROG: Q6.3 R81.1 R104.2 R106.1 R107.2 | length 50.7
  Top Layer w0.2: R106.1 R81.1 -37.02,18.034 -36.83,18.224 -36.83,19.621 -36.639,19.812 R104.2 -35.306,19.812 -35.306,23.368 -34.861,23.812 -34.861,24.955 ; v1(-36.449,49.339) -36.449,35.115 -34.861,33.528 -34.861,24.955 ; Q6.3@-33.081,24.96 -34.857,24.96 -34.861,24.955 ; v1(-24.511,49.339) -23.789,49.339 R107.2
  Bottom Layer w0.2: v1(-36.449,49.339) v1(-24.511,49.339)
PEN_C2CK: U8.25 U10.9 | length 10
  Top Layer w0.2: v1(-16.51,30.734) -13.906,30.734 -13.658,30.485 U8.25
  Bottom Layer w0.2: U10.9 v1(-16.51,30.734)
PEN_C2D: U8.26 U10.10 | length 9.3
  Top Layer w0.2: v1(-17.843,29.464) -16.383,29.464 -16.206,29.287 U8.26
  Bottom Layer w0.2: U10.10 v1(-17.843,29.464)
PEN_S0: U8.28 U9.11 | length 18.1
  Top Layer w0.2: v1(-16.7,27.813) -16.227,28.287 U8.28
  Bottom Layer w0.2: U9.11 -16.954,27.559 v1(-16.7,27.813)
PEN_S1: U8.27 U10.11 | length 9.5
  Top Layer w0.2: v1(-17.843,28.194) -17.25,28.787 U8.27
  Bottom Layer w0.2: U10.11 v1(-17.843,28.194)
PEN_TDO: U8.22 U9.10 | length 28.4
  Top Layer w0.2: v1(-11.493,33.655) -11.493,32.829 -11.358,32.694 U8.22
  Bottom Layer w0.2: U9.10 -15.875,28.829 -14.68,30.024 -12.076,30.024 -10.16,31.94 -10.16,33.528 -10.477,33.845 -11.303,33.845 v1(-11.493,33.655)
PEN_TMS: U8.21 U9.9 | length 24.5
  Top Layer w0.2: U8.21 v1(-10.858,33.146)
  Bottom Layer w0.2: U9.9 -15.367,30.099 -14.732,30.734 -12.383,30.734 -10.858,32.259 v1(-10.858,33.146)
POWER_PROG_EN: R1.1 R94.1 U8.18 | length 12.5
  Top Layer w0.2: R1.1 v1(-9.779,39.37) -9.779,38.758 -9.358,38.337 U8.18
  Bottom Layer w0.2: v1(-9.779,39.37) -8.255,39.37 -8.001,39.116 R94.1
PUP_C2CK: R85.1 U8.11 | length 4.9
  Top Layer w0.2: U8.11 -3.492,29.287 -2.921,29.858 R85.1
PUP_C2D: R83.1 U8.32 | length 5.4
  Top Layer w0.2: v1(-16.891,24.066) -16.891,24.701 -15.305,26.287 U8.32
  Bottom Layer w0.2: R83.1 v1(-16.891,24.066)
PUP_EN: U8.5 U9.6 U10.6 | length 38.2
  Top Layer w0.2: v1(-7.048,25.463) -7.048,26.035 -6.796,26.287 U8.5
  Bottom Layer w0.2: U9.6 -32.956,27.559 ; U10.6 -32.702,28.194 -32.956,27.94 -32.956,27.559 ; v1(-7.048,25.463) -20.32,25.463 -21.145,26.289 -29.337,26.289 -29.972,26.924 -32.679,26.924 -32.956,27.201 -32.956,27.559
PUP_TDO: R70.1 U8.13 | length 33.3
  Top Layer w0.2: R70.1 v1(-34.163,32.766) ; U8.13 -6.858,32.258 v1(-5.651,33.464)
  Bottom Layer w0.2: v1(-34.163,32.766) -33.337,32.766 -32.956,33.147 -13.271,33.147 -12.128,34.29 -6.451,34.29 v1@-5.639,33.477
PUP_TMS: R73.1 U8.12 | length 39.2
  Top Layer w0.2: v1(-6.223,35.179) -5.207,35.179 -3.937,33.909 -3.937,29.908 -4.059,29.787 U8.12
  Bottom Layer w0.2: R73.1 -35.546,33.479 -35.433,33.591 -13.589,33.591 -12.002,35.179 v1(-6.223,35.179)
PVCC3.3: C41.2 C42.2 C43.2 C44.2 C45.2 C46.2 C55.2 P10.2 P13.1 R79.2 R92.1 U8.1 U8.9 U8.24 U8.36 U8.48 U9.16 U10.16 | length 72.8
  Top Layer w0.2: U8.48 -6.604,22.987 -6.35,23.241 C41.2 -5.558,23.525 v1(-5.558,23.939) ; U8.9 U8.9@-5.508,28.337
  Top Layer w0.3: C46.2@-14.541,22.923 v1(-14.541,23.685) -14.541,24.248 -14.503,24.287 U8.36 -11.654,24.287 -10.858,25.082 v1(-10.858,29.273) ; C43.2 -12.358,31.916 U8.24 v1@-12.358,29.376 ; v1(-7.493,29.273) -7.493,28.638 -7.141,28.287 U8.9 C45.2 ; C42.2 U8.48 ; P10.2 -8.241,15.113 R92.1 P13.1 -5.08,20.828 -5.08,23.461 v1(-5.558,23.939) U8.1
  Bottom Layer w0.3: U9.16@-30.848,21.191 -25.1,21.191 -24.447,21.844 U10.16 -16.383,21.844 v1(-14.541,23.685) -14.287,23.939 v1(-5.558,23.939) -3.747,23.939 -3.57,24.116 C55.2 ; C44.2 -12.255,27.924 v1(-12.255,29.273) v1(-10.858,29.273) v1(-7.493,29.273) ; R79.2 P10.2
PWRPROG: R55.1 U8.19 | length 36.3
  Top Layer w0.2: R55.1@-33.083,44.386 v1(-32.385,44.386) v1@-32.371,44.401 ; v1(-12.065,44.386) -12.065,37.592 -11.811,37.338 -10.096,37.338 -9.858,37.099 U8.19
  Bottom Layer w0.2: v1(-32.385,44.386) v1(-12.065,44.386)
SBC2CK: P18.7 P19.4 R120.1 | length 15.2
  Top Layer w0.3: R120.1 -26.289,69.85 ; P18.7 -26.479,63.691 -26.479,67.691 -26.289,67.882 -26.289,69.85 ; P19.4 -26.289,69.85
SBC2D: P18.4 P19.3 R118.1 | length 11.2
  Top Layer w0.3: P18.4 -29.654,68.135 -29.654,70.485 -28.829,71.31 R118.1 P19.3
SBGND: P18.2 P18.3 P18.9 P19.1 | length 22.4
  Top Layer w0.3: P18.2 -35.433,69.406 -33.909,70.929 P19.1
  Bottom Layer w0.3: P18.2 P18.3 -31.623,61.087 -26.543,61.087 P18.9
SBTDO: P18.6
SBTMS: P18.5
SBVCC: P18.1 P19.2 R118.2 R120.2 | length 14.6
  Top Layer w0.3: P18.1 -34.163,63.627 -34.163,65.278 -30.329,69.112 R120.2 R118.2 -30.329,73.382 P19.2
SBVCC5: P18.10
SLED0: D15.1 U8.45 | length 32.7
  Top Layer w0.2: v1(-21.336,24.765) -22.86,24.765 -23.368,25.273 -23.368,29.591 -16.51,36.449 D15.1 ; U8.45 v1(-8.358,24.765)
  Bottom Layer w0.2: v1(-21.336,24.765) v1(-8.358,24.765)
SLED1: D16.1 U8.46 | length 40.8
  Top Layer w0.2: D16.1 -21.209,32.512 -23.968,29.753 -23.968,20.031 -23.685,19.748 -22.924,19.748 v1(-20.892,17.716) ; v1(-7.858,19.05) U8.46
  Bottom Layer w0.2: v1(-20.892,17.716) -20.863,17.688 -19.91,17.688 -18.802,18.796 -8.112,18.796 v1(-7.858,19.05)
SP_TDO: R67.2 U8.29 | length 7.2
  Top Layer w0.2: R67.2 -16.447,27.178 -15.837,27.787 U8.29
SP_TMS: R58.2 U8.14 | length 23.6
  Top Layer w0.2: R58.2 -9.652,51.689 -9.398,51.435 -7.747,51.435 -6.667,50.355 -6.667,36.385 -7.358,35.695 U8.14
SP_VBUS_EN: R86.1 U8.6 | length 22.7
  Top Layer w0.2: R86.1 -19.685,22.098 -19.367,22.415 v1(-19.367,26.098) ; U8.6 -4.308,26.787 -4.064,26.543 v1(-4.064,26.098)
  Bottom Layer w0.2: v1(-19.367,26.098) v1(-4.064,26.098)
SP_VCC5: D17.2 P11.10 Q5.3 | length 70.5
  Top Layer w0.2: v1(-39.052,47.371) -39.052,13.525 -37.782,12.255 -37.782,10.735 Q5.3@-37.785,10.732 ; D17.2 -23.749,47.879 -22.86,48.768 -22.86,52.895 -21.336,54.419 -21.336,55.499 -20.383,56.451 -16.008,56.451 P11.10
  Bottom Layer w0.2: v1(-39.052,47.371) -27.876,47.371 -26.733,46.228 D17.2
SPIO_C2D: R63.2 R64.1 R66.1 R75.1 U10.15 | length 27.3
  Top Layer w0.2: R63.2@-25.146,48.26 -25.146,41.91 -24.511,41.275 -24.511,39.243 -24.811,38.943 -24.811,36.685 -24.575,36.449 v1(-24.575,23.114)
  Bottom Layer w0.2: v1(-24.575,23.114) U10.15
SPMISO: R64.2 U8.16 | length 33.5
  Top Layer w0.2: v1(-27.813,43.497) -27.813,42.862 -27.495,42.545 R64.2 ; v1(-8.89,42.926) -8.89,40.703 -8.358,40.171 U8.16
  Bottom Layer w0.2: v1(-27.813,43.497) -27.368,43.942 -14.577,43.942 -13.561,42.926 v1(-8.89,42.926)
SPMOSI: R66.2 U8.17 | length 46.2
  Top Layer w0.2: v1(-29.527,48.323) -29.527,45.402 -28.575,44.45 R66.2 ; U8.17 -8.858,39.656 -9.652,40.449 -9.652,43.751 -7.81,45.593 v1(-7.81,48.323)
  Bottom Layer w0.2: v1(-29.527,48.323) v1(-7.81,48.323)
SPSCK: R61.2 U8.15 | length 13.6
  Top Layer w0.2: U8.15 -7.858,44.085 -7.747,44.196 R61.2
SPSCK_C2CK: R60.2 R61.1 R62.1 R76.1 U10.4 | length 49.7
  Top Layer w0.2: v1(-29.591,25.654) v1(-29.591,39.351) ; v1(-5.842,41.529) R62.1 R61.1 R76.1 v1(-5.842,50.179)
  Bottom Layer w0.2: v1(-29.591,25.654) U10.4 ; v1(-29.591,39.351) -15.132,39.351 -12.954,41.529 v1(-5.842,41.529) ; R60.2 -6.614,50.179 v1(-5.842,50.179)
SSBC2CK: P25.7 P26.4 R121.1 | length 14.8
  Top Layer w0.3: R121.1 -6.223,70.231 ; P25.7 -6.223,63.627 -6.223,70.231 ; P26.4 -5.715,70.739 -6.223,70.231
SSBC2D: P25.4 P26.3 R119.1 | length 11.3
  Top Layer w0.3: P25.4 -9.08,68.389 -9.08,70.675 -8.255,71.501 P26.3
SSBDM(D-): D1.1 X3.2 | length 4.6
  Top Layer w0.2: D1.1@-23.495,11.75 D1.1 -22.1,11.75 -21.25,10.9 X3.2
  Bottom Layer w0.2: X3.2@-21.472,9.017 X3.2
SSBDP(D+): D1.3 X3.3 | length 10.5
  Top Layer w0.2: D1.3@-23.495,13.65 D1.3 -22.355,13.65 -22.098,13.906 -20.637,13.906 -19.958,13.227 -19.958,11.836 -19.939,11.817 -19.939,8.55 X3.3
SSBGND: P25.2 P25.3 P25.9 P26.1 | length 22.5
  Top Layer w0.3: P25.2 -15.113,68.389 -13.335,70.168 P26.1
  Bottom Layer w0.3: P25.2 P25.3 -11.367,61.151 -6.159,61.151 P25.9
SSBTDO: P25.6
SSBTMS: P25.5
SSBVCC: P25.1 P26.2 R119.2 R121.2 | length 14.7
  Top Layer w0.3: P25.1 -13.779,63.691 -13.779,65.532 -9.755,69.556 R121.2 R119.2 -9.755,73.382 P26.2
SSBVCC5: P25.10
STCK: P11.4 R63.1 | length 14.2
  Top Layer w0.2: v1(-27.446,56.49) -27.446,48.528 -27.178,48.26 R63.1
  Bottom Layer w0.2: v1(-27.446,56.49) -23.59,56.49 P11.4
STDI: P11.7 R60.1 | length 14.7
  Top Layer w0.2: v1(-17.843,50.165) -17.843,53.404 -17.46,53.787 P11.7
  Bottom Layer w0.2: v1(-17.843,50.165) R60.1
STDO: P11.6 R67.1 U9.15 | length 59.3
  Top Layer w0.2: v1(-30.988,22.479) -30.988,49.911 -28.638,52.261 v1(-28.638,54.927) ; R67.1 -22.074,26.329 -21.59,25.844 -21.082,25.844 -20.32,25.082 v1(-20.32,23.784)
  Bottom Layer w0.2: U9.15 v1(-30.988,22.479) -26.289,22.479 -24.984,23.784 v1(-20.32,23.784) ; v1(-28.638,54.927) -27.305,54.927 -26.162,56.07 -21.469,56.07 P11.6
STMS: P11.5 R58.1 U9.4 | length 62.3
  Top Layer w0.2: v1(-37.973,25.019) v1(-37.973,49.974) ; v1(-20.066,49.974) -20.066,50.927 -20.32,51.181 -20.32,53.401 -20,53.721 P11.5 -18.948,56.052 -10.649,56.052 -9.652,55.054 R58.1
  Bottom Layer w0.2: v1(-37.973,25.019) U9.4 ; v1(-37.973,49.974) v1(-20.066,49.974)
SWCLK: P13.4 U8.37 | length 7.3
  Top Layer w0.2: P13.4 -14.986,17.653 -12.358,20.281 U8.37
SWDIO: P13.3 U8.34 | length 15
  Top Layer w0.2: U8.34 -15.353,25.287 -16.129,24.511 -16.129,22.669 -16.925,21.873 -16.925,16.925 -16.383,16.383 -15.24,16.383 -13.97,17.653 P13.3
UCTS: R78.1 U11.23 | length 11.3
  Bottom Layer w0.2: U11.23 -23.433,17.461 -21.907,18.986 -19.875,18.986 -18.796,20.066 R78.1
UDCD: R74.1 U11.1 | length 11.2
  Top Layer w0.2: v1(-15.875,12.509) R74.1
  Bottom Layer w0.2: U11.1 -24.75,13.193 -24.066,12.509 v1(-15.875,12.509)
UDSR: R59.2 U11.27 | length 14.2
  Top Layer w0.2: v1(-12.065,12.509) R59.2
  Bottom Layer w0.2: U11.27 -23.08,15.46 -22.479,14.859 -14.414,14.859 v1(-12.065,12.509)
UDTR: R57.2 U11.28 | length 12.2
  Top Layer w0.2: v1(-13.97,12.446) R57.2
  Bottom Layer w0.2: U11.28 -23.216,14.961 -22.479,14.224 -15.748,14.224 v1(-13.97,12.446)
URI: R65.2 U11.2 | length 18.2
  Top Layer w0.2: v1(-10.16,12.509) R65.2
  Bottom Layer w0.2: U11.2 -25.249,12.93 -24.13,11.811 -10.858,11.811 v1(-10.16,12.509)
URTS: R77.1 U11.24 | length 13.8
  Bottom Layer w0.2: U11.24 -23.299,16.96 -21.907,18.351 -19.939,18.351 -19.05,19.24 -12.002,19.24 -11.811,19.431 R77.1
URX: R69.1 U11.25 | length 17.9
  Bottom Layer w0.2: U11.25 -22.874,16.461 -22.415,16.002 -13.716,16.002 -11.493,13.779 -9.525,13.779 -8.7,12.954 R69.1
USBVCC3V3: C47.1 C48.2 C56.2 D11.2 D13.2 R92.2 R98.1 U11.6 | length 81.8
  Top Layer w0.3: v1(-25.336,41.084) -25.336,22.352 -24.511,21.526 v1(-24.511,10.477) ; C47.1@-10.096,10.731 C47.1 C47.1@-8.255,10.731 ; R92.2 C47.1@-8.255,10.731 ; C48.2 -5.969,10.223 -6.477,10.731 C47.1@-8.255,10.731
  Bottom Layer w0.2: v1(-25.336,41.084) -23.749,41.084 ; D13.2 -23.749,41.084 ; D11.2 -19.05,41.211 -19.177,41.084 -23.749,41.084
  Bottom Layer w0.3: R98.1 -35.145,10.38 -34.544,9.779 -29.337,9.779 ; U11.6 -27.25,13.454 -29.337,11.366 -29.337,9.779 ; v1(-10.096,10.477) v1(-24.511,10.477) -25.209,9.779 -25.209,9.334 -25.463,9.08 -28.638,9.08 -29.337,9.779
USRST: C52.2 R98.2 U11.9 | length 7.4
  Bottom Layer w0.2: R98.2 C52.2 U11.9
USUS: R95.1 U11.11 | length 3.5
  Bottom Layer w0.2: R95.1 -30.148,17.258 -29.351,16.461 U11.11
USUSPEND: Q9.1 R95.2 R97.2 U8.43 | length 33.2
  Top Layer w0.2: v1(-29.21,19.558) -28.829,19.939 -28.067,19.939 -27.92,20.086 Q9.1@-27.92,23.368 ; U8.43 -9.358,19.963 v1(-8.826,19.431)
  Bottom Layer w0.2: R95.2 -31.75,19.367 -31.559,19.558 v1(-29.21,19.558) -19.875,19.558 -18.732,20.701 -10.096,20.701 v1(-8.826,19.431)
UTX: R71.1 U11.26 | length 19.9
  Bottom Layer w0.2: U11.26 -23.009,15.961 -22.479,15.43 -14.034,15.43 -11.747,13.144 -9.946,13.144 -9.271,12.469 -9.271,10.668 -8.763,10.16 R71.1
VBSS: C49.1 C50.2 C53.2 D1.5 D18.2 Q8.2 R91.2 R102.2 R104.1 U11.7 U11.8 U12.1 X3.1 | length 134.5
  Top Layer w0.3: v1(-37.655,13.97) Q8.2 ; R102.2 -31.75,8.509 v1(-31.736,8.495) -30.289,7.048 -28.321,7.048 -27.559,7.81 -27.559,11.747 -26.606,12.7 D1.5 ; C49.1 -30.289,16.383 ; v1(-30.289,45.974) -30.289,16.383 ; C50.2 -29.972,13.589 -30.289,13.906 v1(-30.289,14.16) -30.289,16.383 ; v1(-13.271,47.434) -13.271,46.799 -12.967,46.495 U12.1@-11.557,46.495
  Bottom Layer w0.3: v1(-37.465,20.129) -38.671,18.923 -38.671,13.97 ; v1(-30.289,45.974) -29.273,44.958 -19.113,44.958 -19.05,45.021 D18.2 -19.05,47.117 -18.732,47.434 v1(-13.271,47.434) -6.54,47.434 -6.237,47.131 -5.334,47.131 ; U11.8 -30.289,14.961 ; U11.7 v1(-30.289,14.16) -30.289,14.961 ; X3.1 -17.209,7.698 -17.209,6.032 -18.034,5.207 -22.86,5.207 -24.701,7.048 -30.289,7.048 v1(-31.736,8.495) -38.671,8.495 -38.671,13.97 ; R91.2 -5.334,47.131 ; C53.2 -5.334,47.131 ; -38.671,13.97 v1(-37.655,13.97) -34.417,13.97 -33.426,14.961 -30.289,14.961
VCCPROG: C51.1 P9.2 P11.1 R55.2 R68.1 R72.1 R82.1 R84.1 U12.5 | length 51.1
  Top Layer w0.2: v1(-35.814,37.338) -35.814,38.227 -35.56,38.481 C51.1
  Top Layer w0.3: C51.1 R72.1 R55.2 R68.1 -34.671,47.815 -30.162,52.324 -30.162,57.023 -29.527,57.658 -26.924,57.658 -26.352,57.087 -26.352,55.245 -26.107,55 P11.1 ; U12.5@-11.557,48.895 v1(-11.557,51.308)
  Bottom Layer w0.2: v1(-35.814,37.338) R82.1 R84.1
  Bottom Layer w0.3: P11.1 -25.08,54.036 -24.765,53.721 -22.86,53.721 P9.2 -20.447,51.308 v1(-11.557,51.308)
pads on no net: P11.8 P18.8 P25.8 U8.10 U8.33 U9.12 U9.13 U9.14 U10.12 U10.13 U10.14 U11.10 U11.12 U11.13 U11.14 U11.15 U11.16 U11.17 U11.18 U11.19 U11.20 U11.21 U11.22 U12.4

## Polygon pours and split planes (outlines as drawn)
GNN on Top Layer "Top Layer-No Net" (solid, pour order 1001): 0,0 0,59.88 -40.005,59.88 -40.005,0.005 -40,0
SBGND on Top Layer "Top Layer-No Net" (solid, remove dead copper, pour order 1000): -40.005,76.835 -20.002,76.835 -20.002,60.008 -20.066,60.071 -40.005,60.071
SSBGND on Top Layer "Top Layer-No Net" (solid, remove dead copper, pour order 1002): 0,76.835 0,60.01 -20.002,60.01 -20.002,76.837
GNN on Bottom Layer "Top Layer-No Net" (solid, pour order 1003): 0,0 0,59.88 -40.005,59.88 -40.005,0.005 -40,0
SBGND on Bottom Layer "Top Layer-No Net" (solid, pour order 1002): -40.005,76.835 -20.002,76.835 -20.002,60.008 -20.066,60.071 -40.005,60.071
SSBGND on Bottom Layer "Top Layer-No Net" (solid, remove dead copper, pour order 1002): 0,76.835 0,60.01 -20.002,60.01 -20.002,76.837

## Silkscreen, mask and mechanical layers (free items; w line width, h text height)
Top Solder:
  region: 0,60.515 -40.005,60.515 -40.005,59.499 0,59.499
  region: -19.49,59.66 -19.49,76.835 -20.506,76.835 -20.506,59.66
Bottom Solder:
  region: 0,60.515 -40.005,60.515 -40.005,59.499 0,59.499
  region: -19.49,59.66 -19.49,76.835 -20.506,76.835 -20.506,59.66
BoardOutLine:
  the board outline again, w0.254

## Text inside footprints (layer, text, board x,y; h text height)
P11: Top Overlay "10" at -13.396,57.032 h0.4; Top Overlay "9" at -13.396,54.492 h0.4; Top Overlay "1" at -27.112,54.492 h0.4; Top Overlay "2" at -27.62,57.032 h0.4
P18: Top Overlay "2" at -37.973,64.389 h1.27; Top Overlay "1" at -37.465,61.849 h1.27; Top Overlay "9" at -23.749,61.849 h1.27; Top Overlay "10" at -23.749,64.389 h1.27
P25: Top Overlay "2" at -17.653,64.389 h1.27; Top Overlay "1" at -17.145,61.849 h1.27; Top Overlay "9" at -3.429,61.849 h1.27; Top Overlay "10" at -3.429,64.389 h1.27
U11: Courtyard "COPPER PLANE" at -24.749,14.961 h0.1 r270